# Altium PCB Rezonit_pannels.PcbDoc
Units mm, origin at the board's own origin, x right, y up, seen from the top; angles counter-clockwise.
Board outline 197.8 x 121.1 mm, 2 copper layers (Top Layer, Bottom Layer); 3 components, 0 nets, 3 pads, 0 vias.
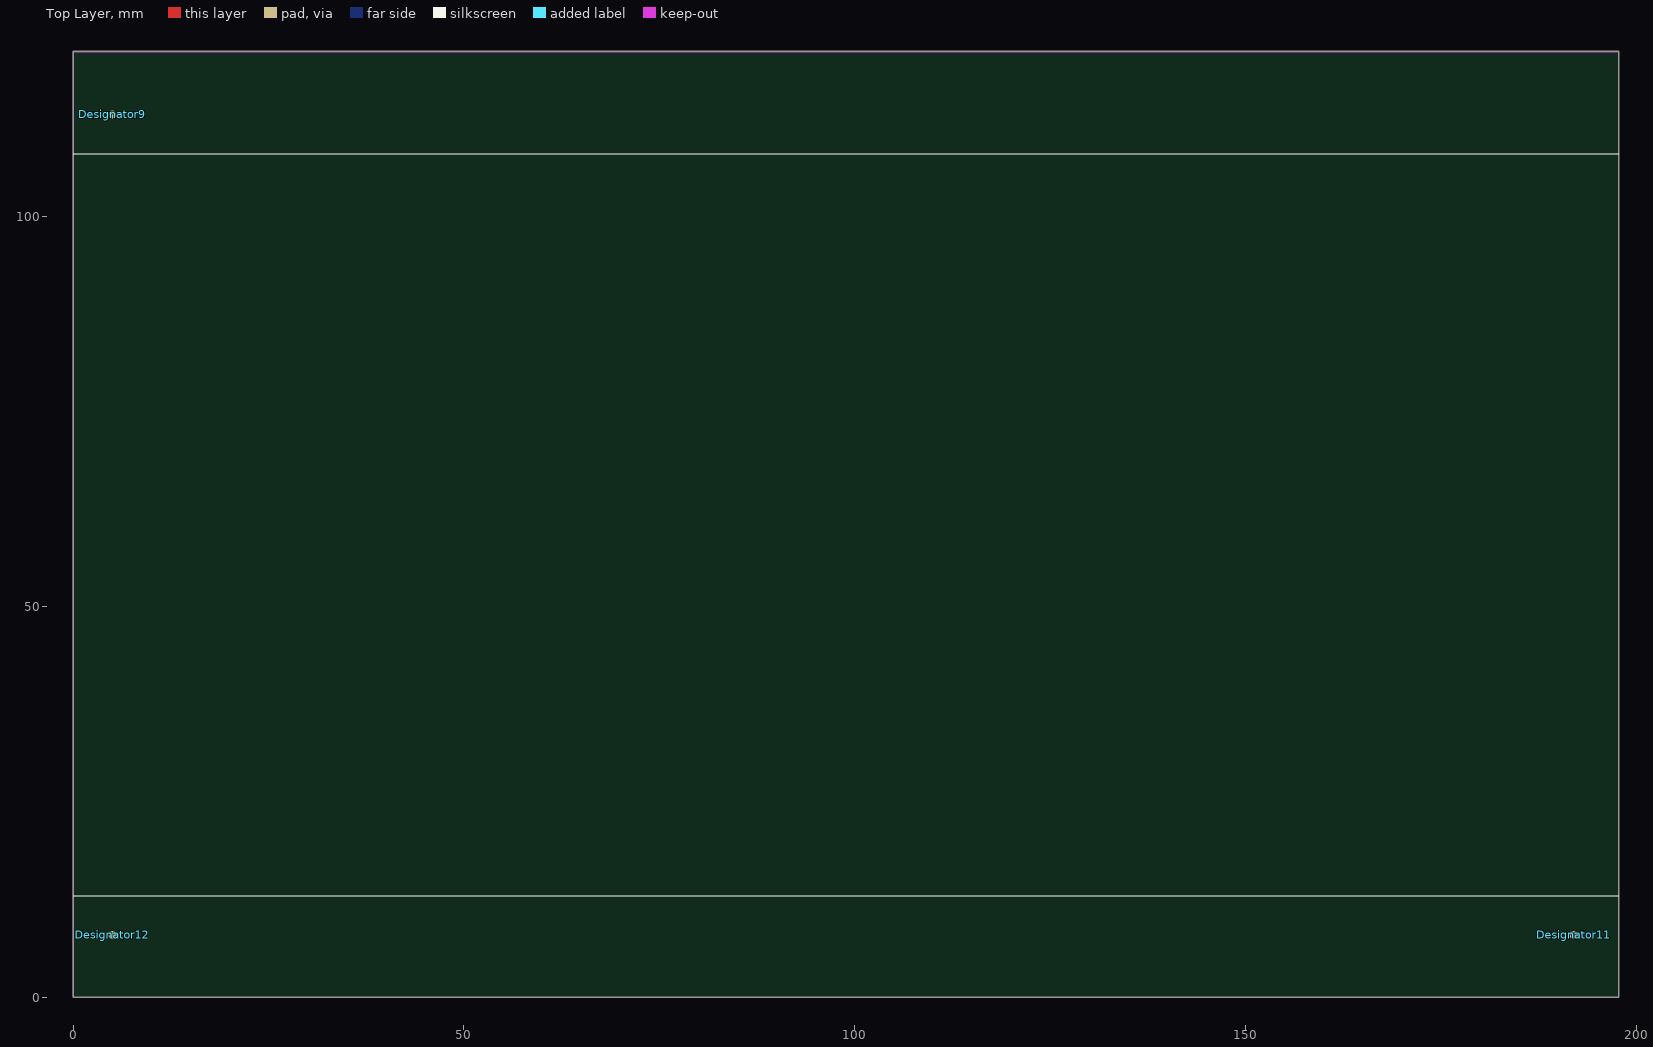
[diagram p0: Top Layer view]
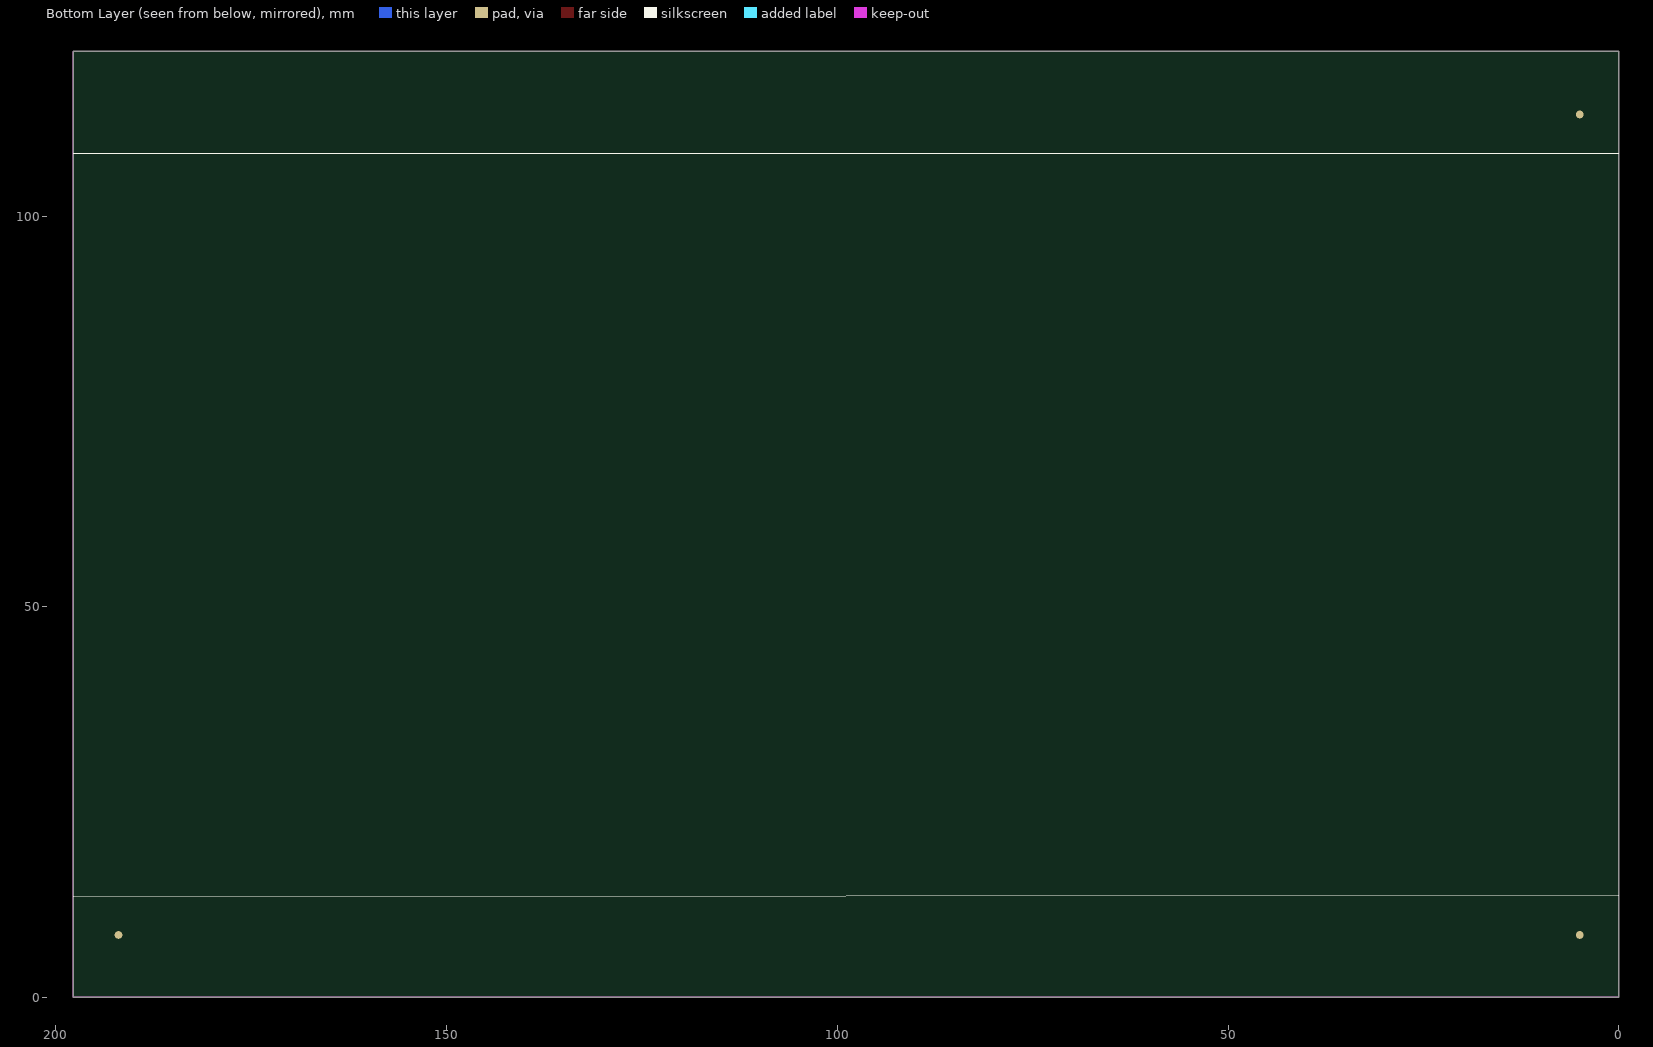
[diagram p1: Bottom Layer view, seen from below]

## Layer stack, top to bottom
Top Solder: solder mask 0.0102, Solder Resist, Dk 3.5
Top Layer: signal copper 0.0356
Dielectric 1: dielectric 0.32, FR-4, Dk 4.8
Bottom Layer: signal copper 0.0356
Bottom Solder: solder mask 0.0102, Solder Resist, Dk 3.5

## Board outline
197.8,121.1 197.8,0 0,0 0,121.1

## Design rules (kind name [scope] priority, off if disabled: settings)
Clearance [All] p1: gap=0.254
PolygonConnect [All] p1: connectstyle=Relief reliefconductorwidth=0.254 reliefentries=4 polygonreliefangle="90 Angle" airgapwidth=0.254
RoutingVias [All] p1: holewidth=0.711 width=1.27 viastyle="Through Hole" minholewidth=0.711 minwidth=1.27 maxholewidth=0.711 maxwidth=1.27
SolderMaskExpansion [All] p1: expansion=0.102
Width [All] p1: maxlimit=0.254 minlimit=0.254 preferedwidth=0.254
30 further rules are at their usual default settings.

## Components (designator, comment, footprint, x,y, rotation, side; value= is the part's Value field where it differs from the comment)
Designator9 "Comment" "RP - minimum" 5,113 r0 top
Designator11 "Comment" "RP - minimum" 192,8 r0 top
Designator12 "Comment" "RP - minimum" 5,8 r0 top

## Footprints (in the part's own frame and the unit in brackets; to place one, negate y for a bottom-side part, rotate by r counter-clockwise, add the part's x,y. Pads: shape width x height; smd on the part's side, far side on the other; paste and mask are expansions set on the pad)
"RP - minimum" [mm]
  round 1 all layers, no hole paste-2 mask+0.5: 0(0,0)

## Nets (pads, with @x,y where several pads share a name; then routed paths per layer and width w, separated by ;. In a path a pad name is that pad's centre, name@x,y a point inside that pad or via, vN(x,y) a via of type N, cw(c..) or ccw(c..) an arc to the next point about the centre after c; other vN are vias at no path point)
pads on no net: Designator9.0 Designator11.0 Designator12.0

## Keep-outs
Keep-Out Layer:
  lines w0.1: 0,0 0,121 148,121 197.8,121 197.8,0 140,0 0,0

## Silkscreen, mask and mechanical layers (free items; w line width, h text height)
Top Overlay:
  lines w0.1: 0,13 197.8,13 ; 0,108 197.8,108
Bottom Overlay:
  lines w0.1: 0,13 197.8,12.9 ; 0,108 197.8,108

## Panel: embedded boards
"Micron-6_00_small border.PcbDoc" at 7.2,16.3, 4 rows x 4 columns, spacing 23.625 x 47.48, rotation 0